# Altium PCB PCB_ft.PcbDoc
Units mm, origin at the board's own origin, x right, y up, seen from the top; angles counter-clockwise.
Board outline 100 x 50 mm, 2 copper layers (Top Layer, Bottom Layer); 107 components, 55 nets, 279 pads, 0 vias.
Unrouted connection lines stored in the file: 214.
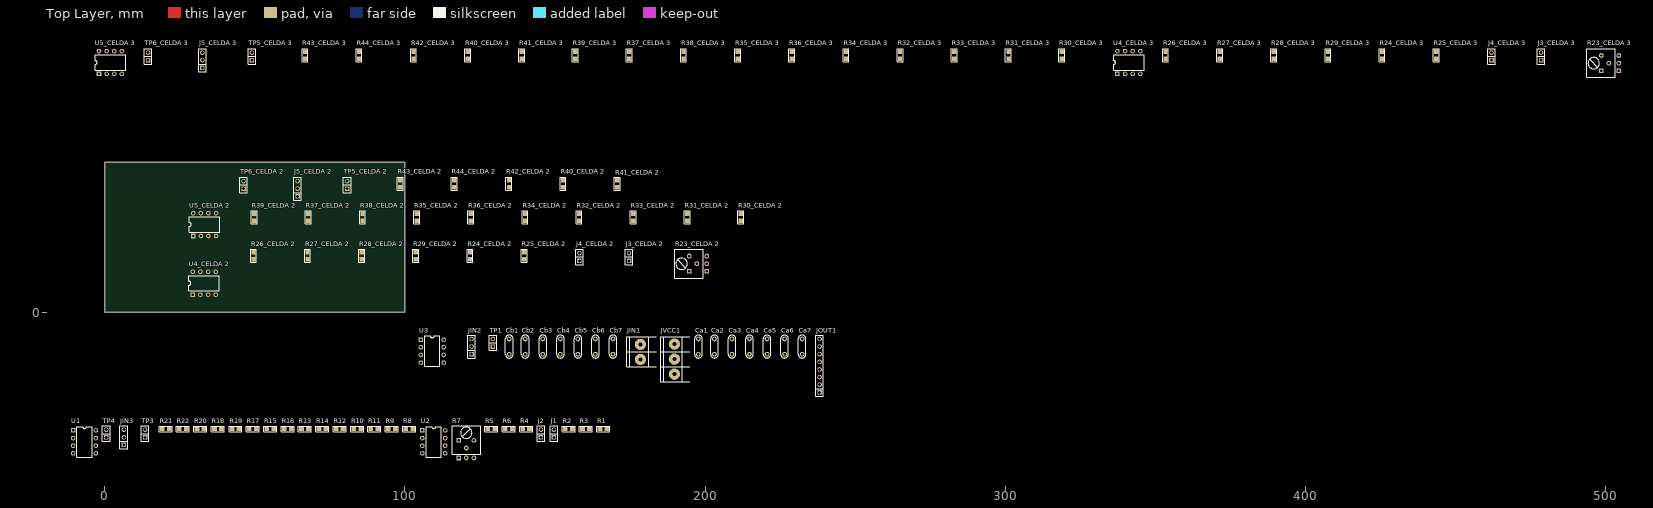
[diagram p0: Top Layer view]
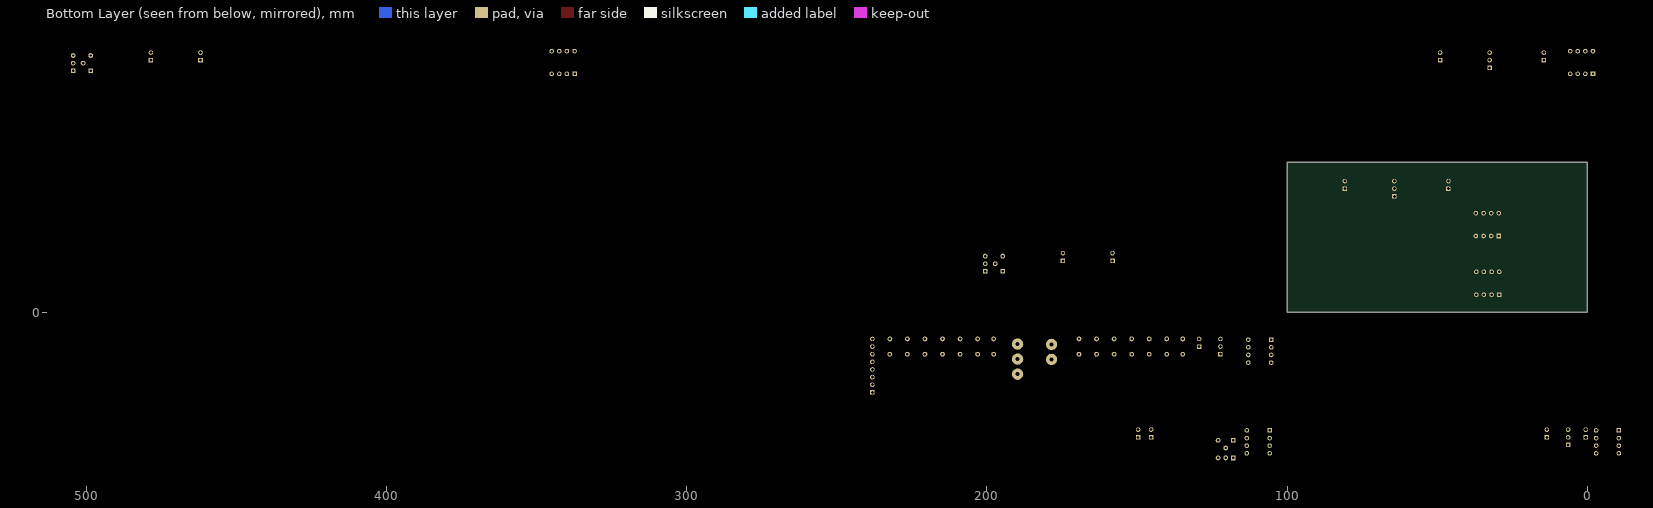
[diagram p1: Bottom Layer view, seen from below]

## Layer stack, top to bottom
Top Solder: solder mask 0.0102, Solder Resist, Dk 3.5
Top Layer: signal copper 0.0356
Dielectric 1: dielectric 0.32, FR-4, Dk 4.8
Bottom Layer: signal copper 0.0356
Bottom Solder: solder mask 0.0102, Solder Resist, Dk 3.5

## Board outline
0,0 100,0 100,50 0,50

## Design rules (kind name [scope] priority, off if disabled: settings)
Clearance [All] p1: gap=0.4 ignorepadtopadclearanceinfootprint=FALSE
PolygonConnect [All] p1: connectstyle=Relief reliefconductorwidth=0.254 reliefentries=4 polygonreliefangle="90 Angle" airgapwidth=0.254
RoomDefinition filter [InComponentClass('filter')] p1: confinementstyle=ConfineIn formatcopy=TRUE lockcomponents=FALSE outline 104.267,-28.194 244.094,-28.194 244.094,-4.826 104.267,-4.826
RoomDefinition "CELDA 3" [InComponentClass('CELDA 3')] p2: confinementstyle=ConfineIn formatcopy=TRUE lockcomponents=FALSE outline -3.683,77.978 510.54,77.978 510.54,90.805 -3.683,90.805
RoomDefinition "CELDA 2" [InComponentClass('CELDA 2')] p3: confinementstyle=ConfineIn formatcopy=TRUE lockcomponents=FALSE outline 25.908,1.905 242.697,1.905 242.697,48.006 25.908,48.006
RoomDefinition "CELDA 1" [InComponentClass('CELDA 1')] p4: confinementstyle=ConfineIn formatcopy=TRUE lockcomponents=FALSE outline -11.557,-49.53 168.529,-49.53 168.529,-35.052 -11.557,-35.052
RoutingVias [All] p1: holewidth=0.4 width=2 viastyle="Through Hole" minholewidth=0.3 minwidth=1.5 maxholewidth=0.5 maxwidth=2
SolderMaskExpansion [All] p1: expansion=0.102
Width [All] p1: maxlimit=0.9 minlimit=0.6 preferedwidth=0.8
30 further rules are at their usual default settings.

## Classes and differential pairs
channel class fleischerTowR3: "CELDA 2" "CELDA 3"
component class filter: Ca1 Ca2 Ca3 Ca4 Ca5 Ca6 Ca7 Cb1 Cb2 Cb3 Cb4 Cb5 Cb6 Cb7 JIN1 JIN2 JOUT1 JVCC1 TP1 U3
component class "CELDA 3": "J3_CELDA 3" "J4_CELDA 3" "J5_CELDA 3" "R23_CELDA 3" "R24_CELDA 3" "R25_CELDA 3" "R26_CELDA 3" "R27_CELDA 3" "R28_CELDA 3" "R29_CELDA 3" "R30_CELDA 3" "R31_CELDA 3" "R32_CELDA 3" "R33_CELDA 3" "R34_CELDA 3" "R35_CELDA 3" "R36_CELDA 3" "R37_CELDA 3" "R38_CELDA 3" "R39_CELDA 3" "R40_CELDA 3" "R41_CELDA 3" "R42_CELDA 3" "R43_CELDA 3" "R44_CELDA 3" "TP5_CELDA 3" "TP6_CELDA 3" "U4_CELDA 3" "U5_CELDA 3"
component class "CELDA 2": "J3_CELDA 2" "J4_CELDA 2" "J5_CELDA 2" "R23_CELDA 2" "R24_CELDA 2" "R25_CELDA 2" "R26_CELDA 2" "R27_CELDA 2" "R28_CELDA 2" "R29_CELDA 2" "R30_CELDA 2" "R31_CELDA 2" "R32_CELDA 2" "R33_CELDA 2" "R34_CELDA 2" "R35_CELDA 2" "R36_CELDA 2" "R37_CELDA 2" "R38_CELDA 2" "R39_CELDA 2" "R40_CELDA 2" "R41_CELDA 2" "R42_CELDA 2" "R43_CELDA 2" "R44_CELDA 2" "TP5_CELDA 2" "TP6_CELDA 2" "U4_CELDA 2" "U5_CELDA 2"
component class "CELDA 1": J1 J2 JIN3 R1 R2 R3 R4 R5 R6 R7 R8 R9 R10 R11 R12 R13 R14 R15 R16 R17 R18 R19 R20 R21 R22 TP3 TP4 U1 U2

## Components (designator, comment, footprint, x,y, rotation, side; value= is the part's Value field where it differs from the comment)
Ca1 "CAP" CAP200 197.739,-11.43 r90 top
Ca2 "CAP" CAP200 203.073,-11.43 r90 top
Ca3 "CAP" CAP200 208.915,-11.43 r90 top
Ca4 "CAP" CAP200 214.757,-11.43 r90 top
Ca5 "CAP" CAP200 220.599,-11.43 r90 top
Ca6 "CAP" CAP200 226.441,-11.43 r90 top
Ca7 "CAP" CAP200 232.283,-11.43 r90 top
Cb1 "CAP" CAP200 134.747,-11.43 r90 top
Cb2 "CAP" CAP200 140.081,-11.43 r90 top
Cb3 "CAP" CAP200 145.923,-11.43 r90 top
Cb4 "CAP" CAP200 151.765,-11.43 r90 top
Cb5 "CAP" CAP200 157.607,-11.43 r90 top
Cb6 "CAP" CAP200 163.449,-11.43 r90 top
Cb7 "CAP" CAP200 169.291,-11.43 r90 top
J1 "C2" SIP2 149.606,-40.386 r90 top
J2 "C1" SIP2 145.288,-40.386 r90 top
"J3_CELDA 2" "C2" SIP2 174.625,18.415 r90 top (schematic designator J3)
"J3_CELDA 3" "C2" SIP2 478.409,85.217 r90 top (schematic designator J3)
"J4_CELDA 2" "C1" SIP2 158.115,18.415 r90 top (schematic designator J4)
"J4_CELDA 3" "C1" SIP2 461.899,85.217 r90 top (schematic designator J4)
"J5_CELDA 2" "JUMPER" JUMPER3 64.262,41.148 r90 top (schematic designator J5)
"J5_CELDA 3" "JUMPER" JUMPER3 32.512,83.947 r90 top (schematic designator J5)
JIN1 "BORNERA 2" BORNERA2 178.435,-13.208 r0 top
JIN2 "JUMPER" JUMPER3 122.174,-11.43 r90 top (schematic designator Jin2)
JIN3 "JUMPER" JUMPER3 6.35,-41.656 r90 top
JOUT1 "CON8" SIP8 238.125,-26.67 r90 top
JVCC1 "BORNERA 3" BORNERA3 189.738,-15.621 r0 top
R1 "RES" 0805 166.116,-38.862 r0 top
R2 "RES" 0805 154.559,-38.862 r0 top
R3 "RES" 0805 160.274,-38.862 r0 top
R4 "RES" 0805 140.335,-38.862 r0 top
R5 "RES" 0805 128.778,-38.862 r0 top
R6 "RES" 0805 134.62,-38.862 r0 top
R7 "PRESET" "PRESET H" 120.396,-42.672 r0 top
R8 "RES" 0805 101.473,-38.862 r0 top
R9 "RES" 0805 95.631,-38.862 r0 top
R10 "RES" 0805 84.074,-38.862 r0 top
R11 "RES" 0805 89.789,-38.862 r0 top
R12 "RES" 0805 78.232,-38.862 r0 top
R13 "RES" 0805 66.675,-38.862 r0 top
R14 "RES" 0805 72.517,-38.862 r0 top
R15 "RES" 0805 55.118,-38.862 r0 top
R16 "RES" 0805 60.96,-38.862 r0 top
R17 "RES" 0805 49.276,-38.862 r0 top
R18 "RES" 0805 37.719,-38.862 r0 top
R19 "RES" 0805 43.561,-38.862 r0 top
R20 "RES" 0805 31.877,-38.862 r0 top
R21 "RES" 0805 20.32,-38.862 r0 top
R22 "RES" 0805 26.035,-38.862 r0 top
"R23_CELDA 2" "PRESET" "PRESET H" 194.691,16.129 r90 top (schematic designator R23)
"R23_CELDA 3" "PRESET" "PRESET H" 498.475,82.931 r90 top (schematic designator R23)
"R24_CELDA 2" "RES" 0805 121.666,18.796 r90 top (schematic designator R24)
"R24_CELDA 3" "RES" 0805 425.45,85.598 r90 top (schematic designator R24)
"R25_CELDA 2" "RES" 0805 139.7,18.796 r90 top (schematic designator R25)
"R25_CELDA 3" "RES" 0805 443.484,85.598 r90 top (schematic designator R25)
"R26_CELDA 2" "RES" 0805 49.53,18.796 r90 top (schematic designator R26)
"R26_CELDA 3" "RES" 0805 353.314,85.598 r90 top (schematic designator R26)
"R27_CELDA 2" "RES" 0805 67.564,18.796 r90 top (schematic designator R27)
"R27_CELDA 3" "RES" 0805 371.348,85.598 r90 top (schematic designator R27)
"R28_CELDA 2" "RES" 0805 85.598,18.796 r90 top (schematic designator R28)
"R28_CELDA 3" "RES" 0805 389.382,85.598 r90 top (schematic designator R28)
"R29_CELDA 2" "RES" 0805 103.632,18.796 r90 top (schematic designator R29)
"R29_CELDA 3" "RES" 0805 407.416,85.598 r90 top (schematic designator R29)
"R30_CELDA 2" "RES" 0805 211.836,31.623 r90 top (schematic designator R30)
"R30_CELDA 3" "RES" 0805 318.77,85.598 r90 top (schematic designator R30)
"R31_CELDA 2" "RES" 0805 194.056,31.623 r90 top (schematic designator R31)
"R31_CELDA 3" "RES" 0805 300.99,85.598 r90 top (schematic designator R31)
"R32_CELDA 2" "RES" 0805 157.988,31.623 r90 top (schematic designator R32)
"R32_CELDA 3" "RES" 0805 264.922,85.598 r90 top (schematic designator R32)
"R33_CELDA 2" "RES" 0805 176.022,31.623 r90 top (schematic designator R33)
"R33_CELDA 3" "RES" 0805 282.956,85.598 r90 top (schematic designator R33)
"R34_CELDA 2" "RES" 0805 139.954,31.623 r90 top (schematic designator R34)
"R34_CELDA 3" "RES" 0805 246.888,85.598 r90 top (schematic designator R34)
"R35_CELDA 2" "RES" 0805 103.886,31.623 r90 top (schematic designator R35)
"R35_CELDA 3" "RES" 0805 210.82,85.598 r90 top (schematic designator R35)
"R36_CELDA 2" "RES" 0805 121.92,31.623 r90 top (schematic designator R36)
"R36_CELDA 3" "RES" 0805 228.854,85.598 r90 top (schematic designator R36)
"R37_CELDA 2" "RES" 0805 67.818,31.623 r90 top (schematic designator R37)
"R37_CELDA 3" "RES" 0805 174.752,85.598 r90 top (schematic designator R37)
"R38_CELDA 2" "RES" 0805 85.852,31.623 r90 top (schematic designator R38)
"R38_CELDA 3" "RES" 0805 192.786,85.598 r90 top (schematic designator R38)
"R39_CELDA 2" "RES" 0805 49.784,31.623 r90 top (schematic designator R39)
"R39_CELDA 3" "RES" 0805 156.718,85.598 r90 top (schematic designator R39)
"R40_CELDA 2" "RES" 0805 152.654,42.799 r90 top (schematic designator R40)
"R40_CELDA 3" "RES" 0805 120.904,85.598 r90 top (schematic designator R40)
"R41_CELDA 2" "RES" 0805 170.688,42.799 r90 top (schematic designator R41)
"R41_CELDA 3" "RES" 0805 138.938,85.598 r90 top (schematic designator R41)
"R42_CELDA 2" "RES" 0805 134.62,42.799 r90 top (schematic designator R42)
"R42_CELDA 3" "RES" 0805 102.87,85.598 r90 top (schematic designator R42)
"R43_CELDA 2" "RES" 0805 98.425,42.799 r90 top (schematic designator R43)
"R43_CELDA 3" "RES" 0805 66.675,85.598 r90 top (schematic designator R43)
"R44_CELDA 2" "RES" 0805 116.459,42.799 r90 top (schematic designator R44)
"R44_CELDA 3" "RES" 0805 84.709,85.598 r90 top (schematic designator R44)
TP1 "JUMPER" JUMPER2 129.286,-10.16 r90 top
TP3 "JUMPER" JUMPER2 13.462,-40.386 r90 top (schematic designator TPIN)
TP4 "JUMPER" JUMPER2 0.508,-40.386 r90 top
"TP5_CELDA 2" "JUMPER" JUMPER2 80.772,42.418 r90 top (schematic designator TP5)
"TP5_CELDA 3" "JUMPER" JUMPER2 49.022,85.217 r90 top (schematic designator TP5)
"TP6_CELDA 2" "JUMPER" JUMPER2 46.228,42.418 r90 top (schematic designator TP6)
"TP6_CELDA 3" "JUMPER" JUMPER2 14.478,85.217 r90 top (schematic designator TP6)
U1 "LM833" DIP8 -10.541,-39.37 r0 top
U2 "LM833" DIP8 105.791,-39.37 r0 top
U3 "LM833" DIP8 105.283,-9.144 r0 top
"U4_CELDA 2" "LM833" DIP8 29.337,5.842 r90 top (schematic designator U4)
"U4_CELDA 3" "LM833" DIP8 337.312,79.375 r90 top (schematic designator U4)
"U5_CELDA 2" "LM833" DIP8 29.464,25.4 r90 top (schematic designator U5)
"U5_CELDA 3" "LM833" DIP8 -1.905,79.375 r90 top (schematic designator U5)

## Footprints (in the part's own frame and the unit in brackets; to place one, negate y for a bottom-side part, rotate by r counter-clockwise, add the part's x,y. Pads: shape width x height; smd on the part's side, far side on the other; paste and mask are expansions set on the pad)
0805 [mil] "Pasivo 0805"
  rect 60x56 smd: 1(-45,0) 2(45,0)
  silkscreen extent -85,-38 85,38, body extent -40,-24 39,25, height 15
BORNERA2 [mm] "Bornera con Tornillos 5mm separación"
  round 3.75 hole 1.3: 1(0,2.5) 2(0,-2.5)
  silkscreen extent -4.6,-5 5.2,5, body extent -3.76,-4.89 3.94,5.61, height 10
BORNERA3 [mm] "Bornera con Tornillos 5mm separación"
  round 3.75 hole 1.3: 1(0,5) 2(0,0) 3(0,-5)
  silkscreen extent -4.6,-7.5 5.2,7.5, body extent -3.76,-7.39 3.94,8.11, height 10.05
CAP200 [mil]
  round 62 hole 32: 1(-100,0) 2(100,0)
  silkscreen extent -150,-50 150,50, body extent -110,-46 110,44, height 246
DIP8 [mil]
  rect 60x60 hole 32: 1(0,0)
  round 60 hole 32: 2(0,-100) 3(0,-200) 4(0,-300) 5(300,-300) 6(300,-200) 7(300,-100) 8(300,0)
  silkscreen extent 50,-350 250,50, body extent -3,-363 303,63, height 177
JUMPER2 [mm]
  rect 1.5x1.5 hole 1.016: 1(-1.27,0)
  round 1.5 hole 1.016: 2(1.27,0)
  silkscreen extent -2.54,-1.27 2.54,1.27, body extent -2.46,-1.27 2.54,1.27, height 9.5
JUMPER3 [mm]
  rect 1.5x1.5 hole 1.016: 1(-2.54,0)
  round 1.5 hole 1.016: 2(0,0) 3(2.54,0)
  silkscreen extent -3.81,-1.27 3.81,1.27, body extent -3.81,-1.3 3.81,1.27, height 16.15
"PRESET H" [mil]
  rect 62x62 hole 32: 1(-98.43,-230) 1(-98.42,0)
  round 62 hole 32: 2(1.57,-230) 2(1.57,-100) 3(101.57,-230) 3(101.57,0)
  silkscreen extent -186,-185 189,190, body extent -190,-188 185,188, height 197
SIP2 [mm]
  rect 1.5x1.5 hole 1.016: 1(-1.27,0)
  round 1.5 hole 1.016: 2(1.27,0)
  silkscreen extent -2.54,-1.27 2.54,1.27
SIP8 [mm]
  rect 1.5x1.5 hole 1.016: 1(0,0)
  round 1.5 hole 1.016: 2(2.54,0) 3(5.08,0) 4(7.62,0) 5(10.16,0) 6(12.7,0) 7(15.24,0) 8(17.78,0)
  silkscreen extent -1.27,-1.27 19.05,1.27, body extent -1.27,-1.27 19.05,1.27, height 8.38

## Part data
J1 J2 "J3_CELDA 2" "J3_CELDA 3" "J4_CELDA 2" "J4_CELDA 3": library part CON2
"J5_CELDA 2" "J5_CELDA 3" JIN3: library part JUMPER3
JIN2: library part JUMPER3TH, "TIRA DE PINES 1x3"
U1 U2 U3 "U4_CELDA 2" "U4_CELDA 3" "U5_CELDA 2" "U5_CELDA 3": "Dual Audio Operational Amplifier"

## Nets (pads, with @x,y where several pads share a name; then routed paths per layer and width w, separated by ;. In a path a pad name is that pad's centre, name@x,y a point inside that pad or via, vN(x,y) a via of type N, cw(c..) or ccw(c..) an arc to the next point about the centre after c; other vN are vias at no path point)
GND: "U4_CELDA 2.3" "U4_CELDA 2.5" "U4_CELDA 3.3" "U4_CELDA 3.5" "U5_CELDA 2.5" "U5_CELDA 3.5" Ca1.2 Ca2.2 Ca3.2 Ca4.2 Ca5.2 Ca6.2 Ca7.2 Cb1.2 Cb2.2 Cb3.2 Cb4.2 Cb5.2 Cb6.2 Cb7.2 JIN1.2 JOUT1.7 JOUT1.8 JVCC1.2 U1.5 U2.3 U2.5 U3.5
NetCb2_1: Cb2.1 Cb3.1 Cb4.1 Cb5.1 Cb6.1 Cb7.1
NetJ1_1: J1.1 R8.2 R11.2 R20.2 R22.2 U2.2
NetJ1_2: J1.2 R1.2 R3.2 U2.1
NetJ2_1: J2.1 R1.1 R2.1
NetJ2_2: J2.2 R7.3
"NetJ3_CELDA 2_1": "J3_CELDA 2.1" "R30_CELDA 2.2" "R33_CELDA 2.2" "R42_CELDA 2.2" "R44_CELDA 2.2" "U4_CELDA 2.2"
"NetJ3_CELDA 2_2": "J3_CELDA 2.2" "R23_CELDA 2.3" "U4_CELDA 2.1"
"NetJ3_CELDA 3_1": "J3_CELDA 3.1" "R30_CELDA 3.2" "R33_CELDA 3.2" "R42_CELDA 3.2" "R44_CELDA 3.2" "U4_CELDA 3.2"
"NetJ3_CELDA 3_2": "J3_CELDA 3.2" "R23_CELDA 3.3" "U4_CELDA 3.1"
"NetJ4_CELDA 2_1": "J4_CELDA 2.1" "R23_CELDA 2.2" "R24_CELDA 2.1" "R26_CELDA 2.1" "R34_CELDA 2.2" "R38_CELDA 2.2" "U5_CELDA 2.6"
"NetJ4_CELDA 2_2": "J4_CELDA 2.2" "R24_CELDA 2.2" "R27_CELDA 2.2"
"NetJ4_CELDA 3_1": "J4_CELDA 3.1" "R23_CELDA 3.2" "R24_CELDA 3.1" "R26_CELDA 3.1" "R34_CELDA 3.2" "R38_CELDA 3.2" "U5_CELDA 3.6"
"NetJ4_CELDA 3_2": "J4_CELDA 3.2" "R24_CELDA 3.2" "R27_CELDA 3.2"
"NetJ5_CELDA 2_1": "J5_CELDA 2.1" "TP6_CELDA 2.1" "TP6_CELDA 2.2" "U5_CELDA 2.1" "U5_CELDA 2.2"
"NetJ5_CELDA 3_1": "J5_CELDA 3.1" "TP6_CELDA 3.1" "TP6_CELDA 3.2" "U5_CELDA 3.1" "U5_CELDA 3.2"
NetJIN2_1: JIN2.1 U3.1 U3.2
NetJIN3_1: JIN3.1 TP4.1 TP4.2 U1.1 U1.2
NetR2_2: R2.2 R3.1
NetR4_1: R4.1 R5.1 R9.2 R14.2 R17.2 R19.2 U2.6
NetR5_2: R5.2 R6.1
NetR7_2: R7.2 R12.2 R16.2 U1.6
NetR9_1: R9.1 R13.1 U1.7
NetR10_2: R10.2 R11.1
NetR13_2: R13.2 R14.1
NetR15_2: R15.2 R16.1
NetR18_2: R18.2 R19.1
NetR21_2: R21.2 R22.1
"NetR25_CELDA 2_1": "R25_CELDA 2.1" "R28_CELDA 2.1" "R31_CELDA 2.2" "R36_CELDA 2.2" "R39_CELDA 2.2" "R41_CELDA 2.2" "U4_CELDA 2.6"
"NetR25_CELDA 3_1": "R25_CELDA 3.1" "R28_CELDA 3.1" "R31_CELDA 3.2" "R36_CELDA 3.2" "R39_CELDA 3.2" "R41_CELDA 3.2" "U4_CELDA 3.6"
"NetR26_CELDA 2_2": "R26_CELDA 2.2" "R27_CELDA 2.1"
"NetR26_CELDA 3_2": "R26_CELDA 3.2" "R27_CELDA 3.1"
"NetR28_CELDA 2_2": "R28_CELDA 2.2" "R29_CELDA 2.1"
"NetR28_CELDA 3_2": "R28_CELDA 3.2" "R29_CELDA 3.1"
"NetR31_CELDA 2_1": "R31_CELDA 2.1" "R35_CELDA 2.1" "U5_CELDA 2.7"
"NetR31_CELDA 3_1": "R31_CELDA 3.1" "R35_CELDA 3.1" "U5_CELDA 3.7"
"NetR32_CELDA 2_2": "R32_CELDA 2.2" "R33_CELDA 2.1"
"NetR32_CELDA 3_2": "R32_CELDA 3.2" "R33_CELDA 3.1"
"NetR35_CELDA 2_2": "R35_CELDA 2.2" "R36_CELDA 2.1"
"NetR35_CELDA 3_2": "R35_CELDA 3.2" "R36_CELDA 3.1"
"NetR37_CELDA 2_2": "R37_CELDA 2.2" "R38_CELDA 2.1"
"NetR37_CELDA 3_2": "R37_CELDA 3.2" "R38_CELDA 3.1"
"NetR40_CELDA 2_2": "R40_CELDA 2.2" "R41_CELDA 2.1"
"NetR40_CELDA 3_2": "R40_CELDA 3.2" "R41_CELDA 3.1"
"NetR43_CELDA 2_2": "R43_CELDA 2.2" "R44_CELDA 2.1"
"NetR43_CELDA 3_2": "R43_CELDA 3.2" "R44_CELDA 3.1"
NetU3_6: U3.6 U3.7
VCC: "U4_CELDA 2.8" "U4_CELDA 3.8" "U5_CELDA 2.8" "U5_CELDA 3.8" Ca1.1 Ca2.1 Ca3.1 Ca4.1 Ca5.1 Ca6.1 Ca7.1 JVCC1.1 U1.8 U2.8 U3.8
VEE: "U4_CELDA 2.4" "U4_CELDA 3.4" "U5_CELDA 2.4" "U5_CELDA 3.4" Cb1.1 JVCC1.3 U1.4 U2.4 U3.4
VIN: JIN1.1 JIN3.3 TP3.1 TP3.2 U1.3
VinFT: "J5_CELDA 2.2" "J5_CELDA 3.2" "R34_CELDA 2.1" "R34_CELDA 3.1" "R37_CELDA 2.1" "R37_CELDA 3.1" "R39_CELDA 2.1" "R39_CELDA 3.1" "R40_CELDA 2.1" "R40_CELDA 3.1" "R42_CELDA 2.1" "R42_CELDA 3.1" "R43_CELDA 2.1" "R43_CELDA 3.1" JIN3.2 R12.1 R15.1 R17.1 R18.1 R20.1 R21.1
Vo1: "J5_CELDA 2.3" "TP5_CELDA 2.1" "TP5_CELDA 2.2" "U5_CELDA 2.3" R4.2 R6.2 R8.1 R10.1 U2.7
Vo2: "J5_CELDA 3.3" "R25_CELDA 2.2" "R29_CELDA 2.2" "R30_CELDA 2.1" "R32_CELDA 2.1" "TP5_CELDA 3.1" "TP5_CELDA 3.2" "U4_CELDA 2.7" "U5_CELDA 3.3"
Vo3: "R25_CELDA 3.2" "R29_CELDA 3.2" "R30_CELDA 3.1" "R32_CELDA 3.1" "U4_CELDA 3.7" JIN2.3 TP1.1 TP1.2 U3.3
VOUT: JIN2.2 JOUT1.1 JOUT1.2
pads on no net: "R23_CELDA 2.1" "R23_CELDA 3.1" JOUT1.3 JOUT1.4 JOUT1.5 JOUT1.6 R7.1